# Altium PCB LCD_Board.PcbDoc
Units mil, origin at the board's own origin, x right, y up, seen from the top; angles counter-clockwise.
Board outline 1830 x 440 mil, 2 copper layers (Top Layer, Bottom Layer); 2 components, 22 nets, 30 pads, 0 vias.
Unrouted connection lines stored in the file: 1.
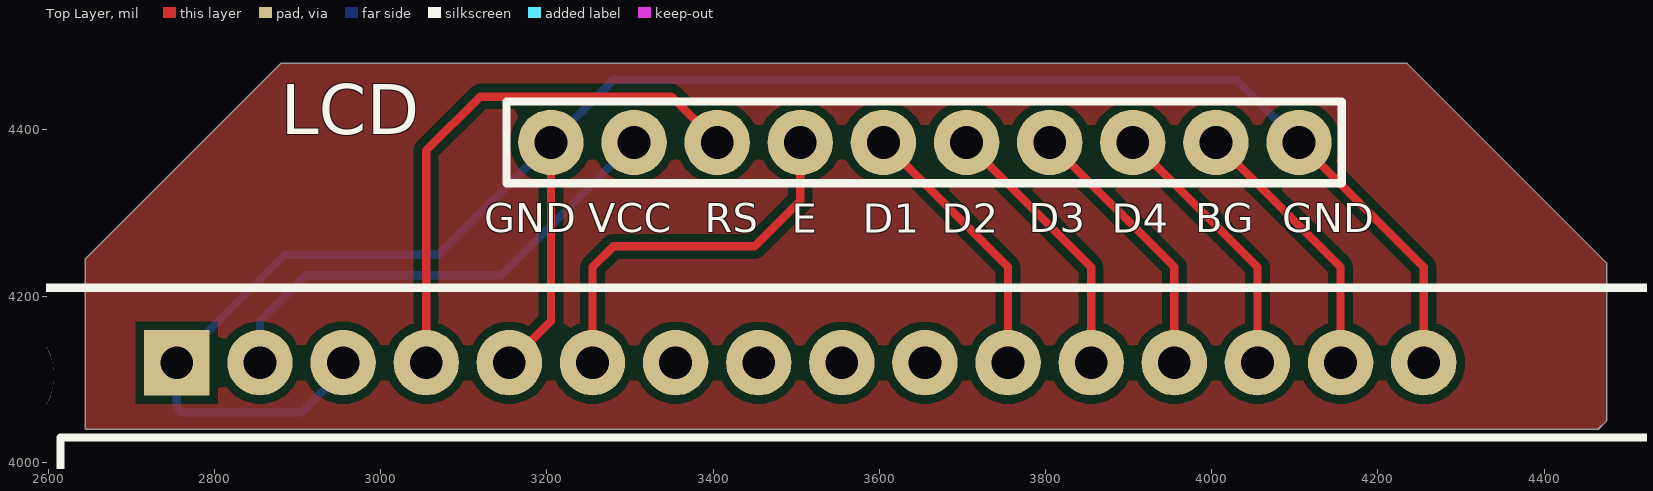
[diagram p0: Top Layer view]
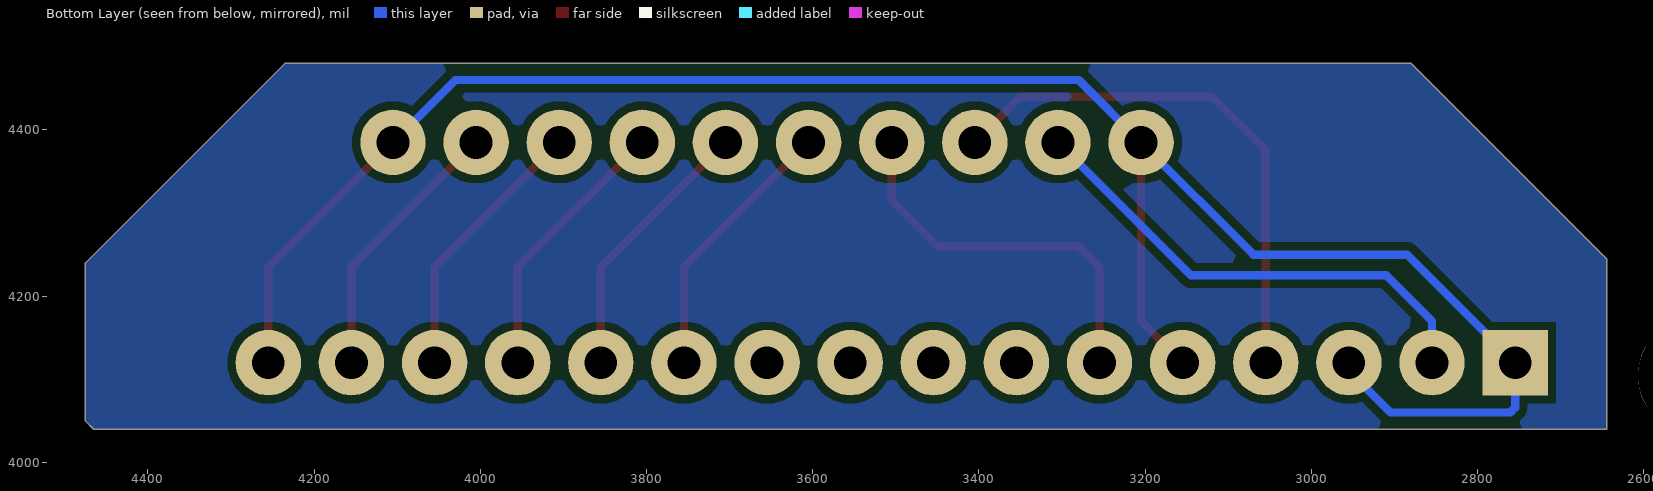
[diagram p1: Bottom Layer view, seen from below]

## Layer stack, top to bottom
Top Solder: solder mask 0.4, Solder Resist, Dk 3.5
Top Layer: signal copper 1.4
Dielectric 1: dielectric 12.6, FR-4, Dk 4.8
Bottom Layer: signal copper 1.4
Bottom Solder: solder mask 0.4, Solder Resist, Dk 3.5

## Board outline
2645,4040 2645,4245 2880,4480 4235,4480 4475,4240 4475,4050 4465,4040

## Design rules (kind name [scope] priority, off if disabled: settings)
Clearance [All] p1: gap=10 ignorepadtopadclearanceinfootprint=FALSE
PolygonConnect [All] p1: connectstyle=Relief reliefconductorwidth=10 reliefentries=4 polygonreliefangle="90 Angle" airgapwidth=10
RoutingVias [All] p1: holewidth=28 width=50 viastyle="Through Hole" minholewidth=28 minwidth=50 maxholewidth=28 maxwidth=50
SolderMaskExpansion [All] p1: expansion=4 istentingtop=FALSE
Width [All] p1: maxlimit=10 minlimit=10 preferedwidth=10
30 further rules are at their usual default settings.

## Components (designator, comment, footprint, x,y, rotation, side; value= is the part's Value field where it differs from the comment)
LCD "MALE-2.54-10P" MALE-2.54-10P 3655,4385 r90 top
U1 "DISPLAY_LCD_16_2" DISPLAY_LCD_16_2 4014.8,3511.71 r0 top

## Footprints (in the part's own frame and the unit in brackets; to place one, negate y for a bottom-side part, rotate by r counter-clockwise, add the part's x,y. Pads: shape width x height; smd on the part's side, far side on the other; paste and mask are expansions set on the pad)
DISPLAY_LCD_16_2 [mm]
  rect 2x2 hole 1: 1(-31.999,15.451)
  round 2 hole 1: 2(-29.459,15.451) 3(-26.919,15.451) 4(-24.379,15.451) 5(-21.839,15.451) 6(-19.299,15.451) 7(-16.759,15.451) 8(-14.219,15.451) 9(-11.679,15.451) 10(-9.139,15.451) 11(-6.599,15.451) 12(-4.059,15.451) 13(-1.519,15.451) 14(1.021,15.451) 15(3.561,15.451) 16(6.101,15.451)
  round 3.5 hole 3.5 unplated: ""(-37.5,-15.451) ""(-37.5,15.049) ""(37.5,-15.451) ""(37.5,15.049)
  silkscreen extent -40.35,-18.2 40.3,17.74, body extent -40.35,-18.26 40.35,17.74, height 12
MALE-2.54-10P [mm]
  round 2 hole 1: 1(0,11.43) 2(0,8.89) 3(0,6.35) 4(0,3.81) 5(0,1.27) 6(0,-1.27) 7(0,-3.81) 8(0,-6.35) 9(0,-8.89) 10(0,-11.43)
  silkscreen extent -1.25,-12.74 1.25,12.79, body extent -1.24,-12.74 1.16,12.66, height 8.36

## Part data
LCD: "Male Header Connector 2.54mm 10 Pins.", JLCPCB PN=C492409
U1: "Display LCD 16x2 I2C."

## Nets (pads, with @x,y where several pads share a name; then routed paths per layer and width w, separated by ;. In a path a pad name is that pad's centre, name@x,y a point inside that pad or via, vN(x,y) a via of type N, cw(c..) or ccw(c..) an arc to the next point about the centre after c; other vN are vias at no path point)
19V: 
GND: LCD.1 LCD.10 U1.1 U1.3 U1.5 U1.16 | length 2422
  Top Layer w10: U1.5 3205,4170 LCD.1 ; LCD.10 4255,4235 U1.16
  Bottom Layer w10: U1.3 2955,4110 2905,4060 2760.86,4060 2755,4065.86 U1.1 2885,4250 3070,4250 LCD.1 3280,4460 4030,4460 LCD.10
GROUND: 
NetBAT_1: 
NetC1_2: LCD.2 LCD.9 U1.2 U1.15 | length 916.2
  Top Layer w10: LCD.9 4155,4235 U1.15
  Bottom Layer w10: U1.2 2855,4170 2910,4225 3145,4225 LCD.2
NetC2_2: 
NetD1_2: 
NetD4_1: 
NetD4_2: 
NetD5_1: LCD.4 U1.6 | length 468.1
  Top Layer w10: U1.6 3255,4235 3280,4260 3450,4260 3505,4315 LCD.4
NetD5_2: 
NetDEBUG_1: 
NetDEBUG_2: 
NetGSM_3: 
NetLCD_3: LCD.3 U1.4 | length 654.7
  Top Layer w10: U1.4 3055,4375 3120,4440 3350,4440 LCD.3
NetLCD_4: 
NetLCD_5: LCD.5 U1.11 | length 327.1
  Top Layer w10: LCD.5 3755,4235 U1.11
NetLCD_6: LCD.6 U1.12 | length 327.1
  Top Layer w10: LCD.6 3855,4235 U1.12
NetLCD_7: LCD.7 U1.13 | length 327.1
  Top Layer w10: LCD.7 3955,4235 U1.13
NetLCD_8: LCD.8 U1.14 | length 327.1
  Top Layer w10: LCD.8 4055,4235 U1.14
RX_GSM: 
TX_GSM: 
pads on no net: U1. U1.7 U1.8 U1.9 U1.10

## Polygon pours and split planes (outlines as drawn)
no net on Top Layer "NONET_L01_P000" (solid, pour order 0): 2880,4480 2645,4245 2645,4040 4465,4040 4475,4050 4475,4240 4235,4480
no net on Bottom Layer "NONET_L02_P001" (solid, pour order 1): 2645,4245 2880,4480 4235,4480 4475,4240 4475,4050 4465,4040 2645,4040

## Silkscreen, mask and mechanical layers (free items; w line width, h text height)
Top Overlay:
  text "GND" at 3125,4265.62 h60
  text "VCC" at 3250.04,4265.62 h60
  text "RS" at 3390,4265.62 h60
  text "D3" at 3780,4265.67 h60
  text "BG" at 3980,4265.62 h60
  text "GND" at 4085,4265.62 h60
  text "E" at 3495,4265 h60
  text "D1" at 3580,4265 h60
  text "D2" at 3675,4265 h60
  text "D4" at 3880,4265 h60
Mechanical 1:
  lines w10: 2645,4240 2645,4245 2880,4480 4235,4480 4475,4240 4475,4050 4465,4040 2645,4040 2645,4242.5